# EAGLE board RedBot_Line_Sensor Panel v10 (EAGLE 6.4), part 1 of 2
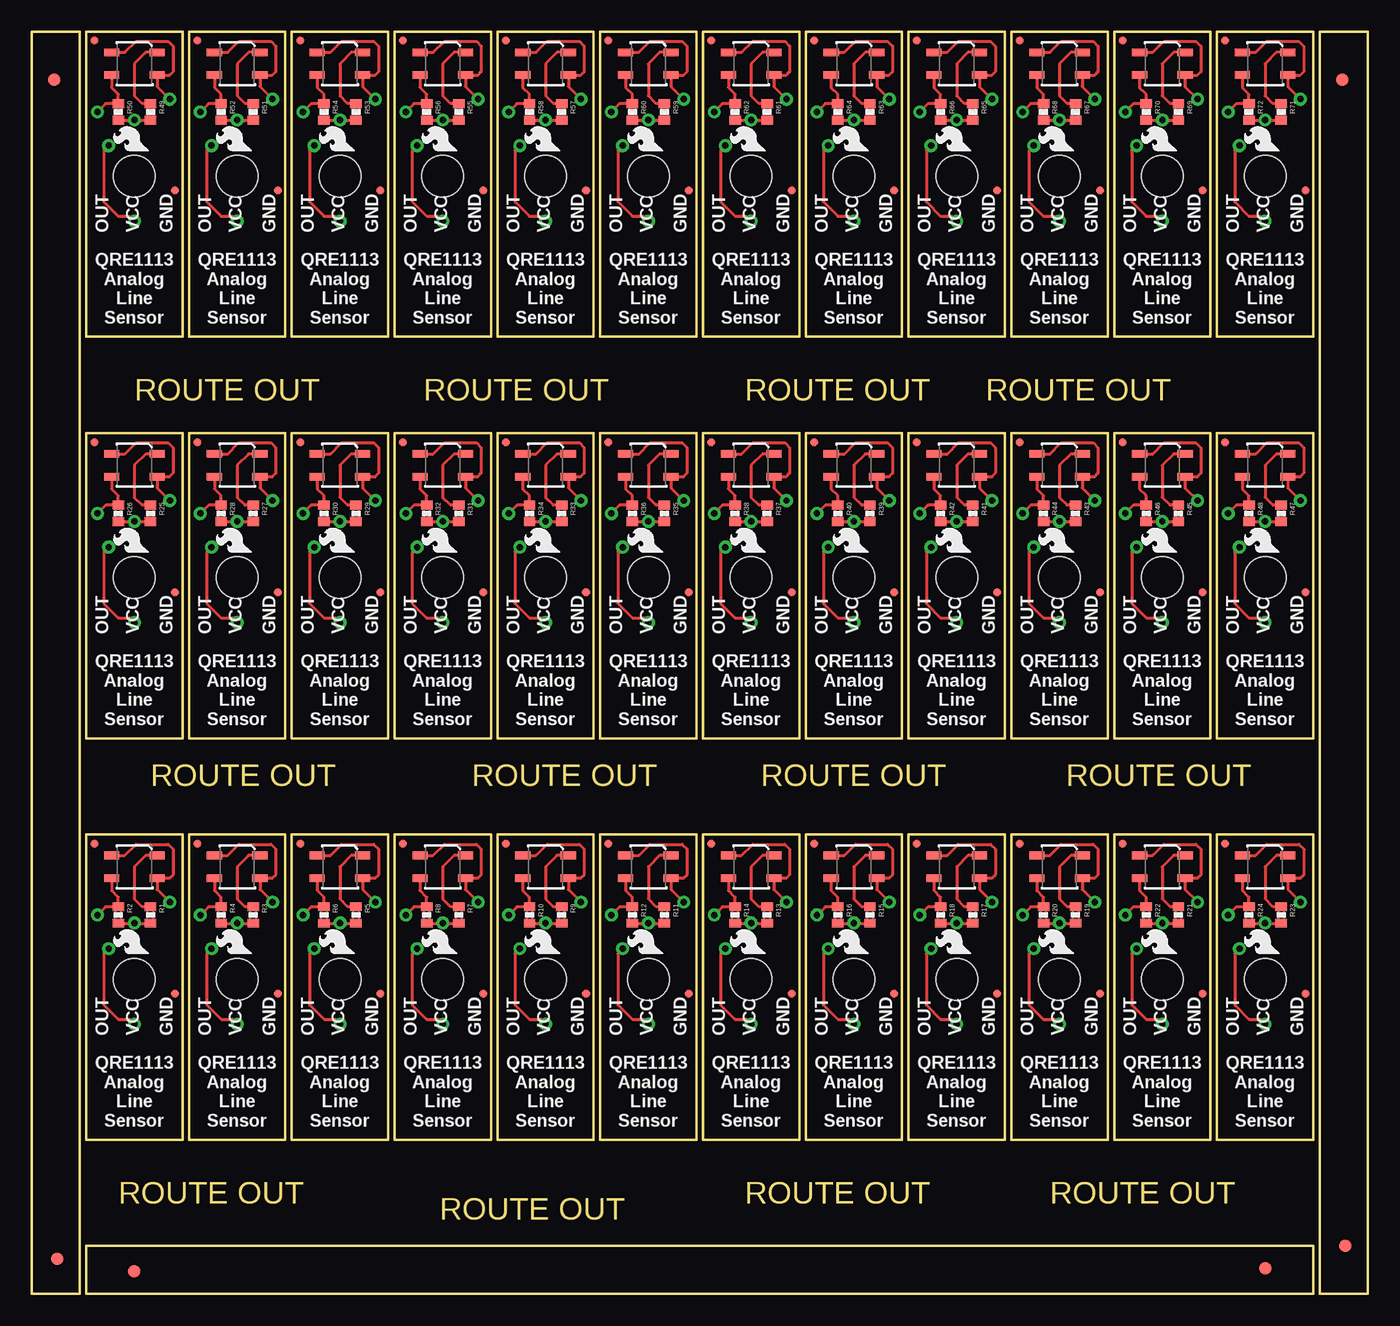
[diagram p0: board, top side]
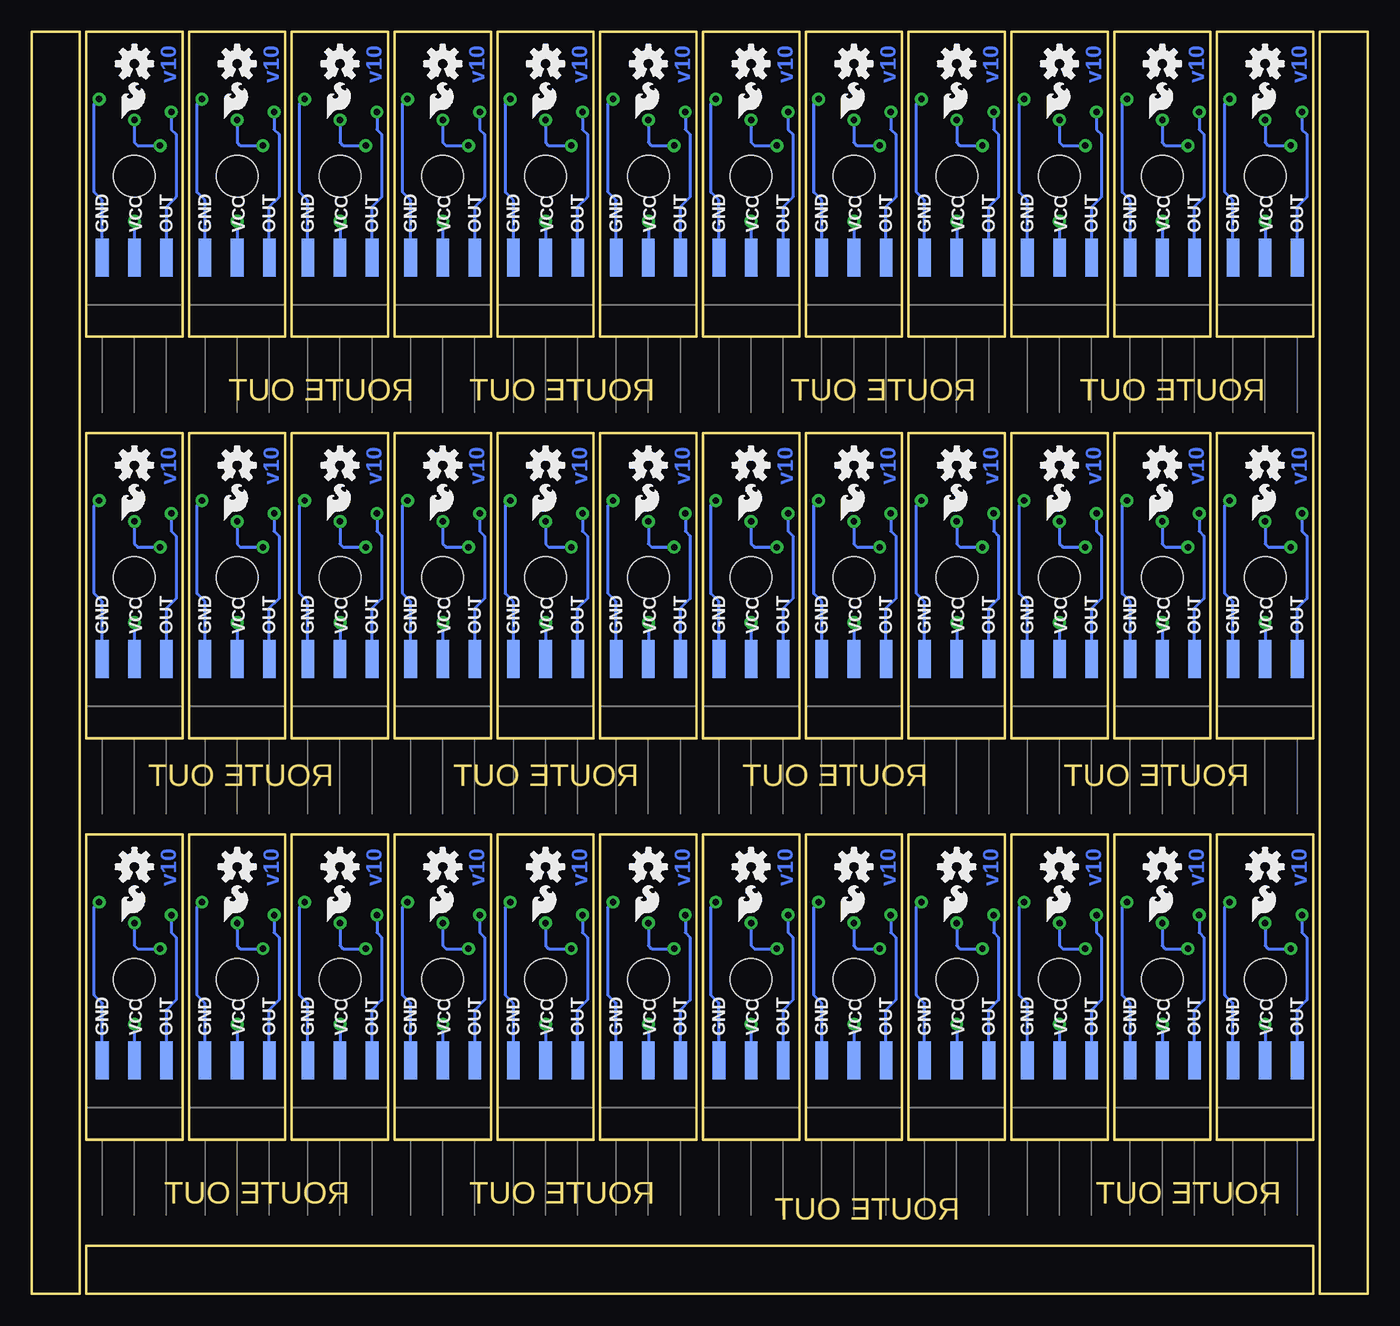
[diagram p1: board, bottom side, seen from below]

Size 105.66 x 99.82 mm. Coordinates in mm from the lower left corner, seen from the top.
Outline: 3.81,92.71 3.81,0 0,0 0,26.67
Outline: 0,10.92 0,99.82 3.81,99.82 3.81,76.96
Outline: 93.22,0 4.32,0 4.32,3.81 27.18,3.81
Outline: 101.85,1.52 101.85,78.23 101.85,97.28 101.85,99.82 105.66,99.82 105.66,76.96
Outline: 98.81,3.81 79.76,3.81
Outline: 79.76,3.81 12.45,3.81
Outline: 79.76,3.81 101.35,3.81 101.35,0 78.49,0
Outline: 105.66,2.54 105.66,21.59
Outline: 105.66,21.59 105.66,88.9
Outline: 105.66,21.59 105.66,0 101.85,0 101.85,22.86
Outline: 4.32,12.19 11.94,12.19 11.94,36.32 4.32,36.32 4.32,12.19
Outline: 12.45,12.19 20.07,12.19 20.07,36.32 12.45,36.32 12.45,12.19
Outline: 20.57,12.19 28.19,12.19 28.19,36.32 20.57,36.32 20.57,12.19
Outline: 28.7,12.19 36.32,12.19 36.32,36.32 28.7,36.32 28.7,12.19
Outline: 36.83,12.19 44.45,12.19 44.45,36.32 36.83,36.32 36.83,12.19
Outline: 44.96,12.19 52.58,12.19 52.58,36.32 44.96,36.32 44.96,12.19
Outline: 53.09,12.19 60.71,12.19 60.71,36.32 53.09,36.32 53.09,12.19
Outline: 61.21,12.19 68.83,12.19 68.83,36.32 61.21,36.32 61.21,12.19
Outline: 69.34,12.19 76.96,12.19 76.96,36.32 69.34,36.32 69.34,12.19
Outline: 77.47,12.19 85.09,12.19 85.09,36.32 77.47,36.32 77.47,12.19
Outline: 85.6,12.19 93.22,12.19 93.22,36.32 85.6,36.32 85.6,12.19
Outline: 93.73,12.19 101.35,12.19 101.35,36.32 93.73,36.32 93.73,12.19
Outline: 4.32,43.94 11.94,43.94 11.94,68.07 4.32,68.07 4.32,43.94
Outline: 12.45,43.94 20.07,43.94 20.07,68.07 12.45,68.07 12.45,43.94
Outline: 20.57,43.94 28.19,43.94 28.19,68.07 20.57,68.07 20.57,43.94
Outline: 28.7,43.94 36.32,43.94 36.32,68.07 28.7,68.07 28.7,43.94
Outline: 36.83,43.94 44.45,43.94 44.45,68.07 36.83,68.07 36.83,43.94
Outline: 44.96,43.94 52.58,43.94 52.58,68.07 44.96,68.07 44.96,43.94
Outline: 53.09,43.94 60.71,43.94 60.71,68.07 53.09,68.07 53.09,43.94
Outline: 61.21,43.94 68.83,43.94 68.83,68.07 61.21,68.07 61.21,43.94
Outline: 69.34,43.94 76.96,43.94 76.96,68.07 69.34,68.07 69.34,43.94
Outline: 77.47,43.94 85.09,43.94 85.09,68.07 77.47,68.07 77.47,43.94
Outline: 85.6,43.94 93.22,43.94 93.22,68.07 85.6,68.07 85.6,43.94
Outline: 93.73,43.94 101.35,43.94 101.35,68.07 93.73,68.07 93.73,43.94
Outline: 4.32,75.69 11.94,75.69 11.94,99.82 4.32,99.82 4.32,75.69
Outline: 12.45,75.69 20.07,75.69 20.07,99.82 12.45,99.82 12.45,75.69
Outline: 20.57,75.69 28.19,75.69 28.19,99.82 20.57,99.82 20.57,75.69
Outline: 28.7,75.69 36.32,75.69 36.32,99.82 28.7,99.82 28.7,75.69
Outline: 36.83,75.69 44.45,75.69 44.45,99.82 36.83,99.82 36.83,75.69
Outline: 44.96,75.69 52.58,75.69 52.58,99.82 44.96,99.82 44.96,75.69
Outline: 53.09,75.69 60.71,75.69 60.71,99.82 53.09,99.82 53.09,75.69
Outline: 61.21,75.69 68.83,75.69 68.83,99.82 61.21,99.82 61.21,75.69
Outline: 69.34,75.69 76.96,75.69 76.96,99.82 69.34,99.82 69.34,75.69
Outline: 77.47,75.69 85.09,75.69 85.09,99.82 77.47,99.82 77.47,75.69
Outline: 85.6,75.69 93.22,75.69 93.22,99.82 85.6,99.82 85.6,75.69
Outline: 93.73,75.69 101.35,75.69 101.35,99.82 93.73,99.82 93.73,75.69
Copper layers (1*16): Top 0.035mm / dielectric 1.5mm / Bottom 0.035mm
Design rules "Sparkfun": minimum track width 8mil, minimum drill 20mil, track to track 8mil, track to pad 8mil, pad to pad 8mil, via to via 8mil, smd to smd 8mil, copper to edge 8mil, drill to drill 8mil, minimum pad ring 12mil, minimum via ring 10mil, stop-mask expansion 4mil, vias tented up to drill 20mil, thermal gap 10mil

## Footprints (pad centres in the part's own frame; a part is rotated, then mirrored left to right if it is on the bottom)
FIDUCIAL-1X2 = smd 1 x 1: 1 0,0
MICRO-FIDUCIAL = smd 0.635 x 0.635: 1 0,0
1X03_SMD_RA_MALE = smd 1 x 3: 1 -2.54,5; 2 0,5; 3 2.54,5
0402-RES = smd 0.7 x 0.9: 1 -0.65,0; 2 0.65,0
STAND-OFF = hole 3.302: 0,0
QRE1113 = smd 1.2 x 0.6: 1 -1.8,-0.9; 2 1.8,-0.9; 3 1.8,0.9; 4 -1.8,0.9

## Placement (x,y rotation side)
E$1  [FIDUCIAL-1X2]  2.03,2.79 0 top
E$2  [FIDUCIAL-1X2]  1.78,96.01 180 top
E$3  [FIDUCIAL-1X2]  8.13,1.78 270 top
E$4  [FIDUCIAL-1X2]  103.63,96.01 180 top
E$5  [FIDUCIAL-1X2]  97.54,2.03 90 top
E$6  [FIDUCIAL-1X2]  103.89,3.81 0 top
FID1  FIDUCIALUFIDUCIAL  [MICRO-FIDUCIAL]  11.33,23.75 0 top
FID2  FIDUCIALUFIDUCIAL  [MICRO-FIDUCIAL]  4.98,35.61 0 top
FID3  FIDUCIALUFIDUCIAL  [MICRO-FIDUCIAL]  19.46,23.75 0 top
FID4  FIDUCIALUFIDUCIAL  [MICRO-FIDUCIAL]  13.11,35.61 0 top
FID5  FIDUCIALUFIDUCIAL  [MICRO-FIDUCIAL]  27.58,23.75 0 top
FID6  FIDUCIALUFIDUCIAL  [MICRO-FIDUCIAL]  21.23,35.61 0 top
FID7  FIDUCIALUFIDUCIAL  [MICRO-FIDUCIAL]  35.71,23.75 0 top
FID8  FIDUCIALUFIDUCIAL  [MICRO-FIDUCIAL]  29.36,35.61 0 top
FID9  FIDUCIALUFIDUCIAL  [MICRO-FIDUCIAL]  43.84,23.75 0 top
FID10  FIDUCIALUFIDUCIAL  [MICRO-FIDUCIAL]  37.49,35.61 0 top
FID11  FIDUCIALUFIDUCIAL  [MICRO-FIDUCIAL]  51.97,23.75 0 top
FID12  FIDUCIALUFIDUCIAL  [MICRO-FIDUCIAL]  45.62,35.61 0 top
FID13  FIDUCIALUFIDUCIAL  [MICRO-FIDUCIAL]  60.1,23.75 0 top
FID14  FIDUCIALUFIDUCIAL  [MICRO-FIDUCIAL]  53.75,35.61 0 top
FID15  FIDUCIALUFIDUCIAL  [MICRO-FIDUCIAL]  68.22,23.75 0 top
FID16  FIDUCIALUFIDUCIAL  [MICRO-FIDUCIAL]  61.87,35.61 0 top
FID17  FIDUCIALUFIDUCIAL  [MICRO-FIDUCIAL]  76.35,23.75 0 top
FID18  FIDUCIALUFIDUCIAL  [MICRO-FIDUCIAL]  70,35.61 0 top
FID19  FIDUCIALUFIDUCIAL  [MICRO-FIDUCIAL]  84.48,23.75 0 top
FID20  FIDUCIALUFIDUCIAL  [MICRO-FIDUCIAL]  78.13,35.61 0 top
FID21  FIDUCIALUFIDUCIAL  [MICRO-FIDUCIAL]  92.61,23.75 0 top
FID22  FIDUCIALUFIDUCIAL  [MICRO-FIDUCIAL]  86.26,35.61 0 top
FID23  FIDUCIALUFIDUCIAL  [MICRO-FIDUCIAL]  100.74,23.75 0 top
FID24  FIDUCIALUFIDUCIAL  [MICRO-FIDUCIAL]  94.39,35.61 0 top
FID25  FIDUCIALUFIDUCIAL  [MICRO-FIDUCIAL]  11.33,55.5 0 top
FID26  FIDUCIALUFIDUCIAL  [MICRO-FIDUCIAL]  4.98,67.36 0 top
FID27  FIDUCIALUFIDUCIAL  [MICRO-FIDUCIAL]  19.46,55.5 0 top
FID28  FIDUCIALUFIDUCIAL  [MICRO-FIDUCIAL]  13.11,67.36 0 top
FID29  FIDUCIALUFIDUCIAL  [MICRO-FIDUCIAL]  27.58,55.5 0 top
FID30  FIDUCIALUFIDUCIAL  [MICRO-FIDUCIAL]  21.23,67.36 0 top
FID31  FIDUCIALUFIDUCIAL  [MICRO-FIDUCIAL]  35.71,55.5 0 top
FID32  FIDUCIALUFIDUCIAL  [MICRO-FIDUCIAL]  29.36,67.36 0 top
FID33  FIDUCIALUFIDUCIAL  [MICRO-FIDUCIAL]  43.84,55.5 0 top
FID34  FIDUCIALUFIDUCIAL  [MICRO-FIDUCIAL]  37.49,67.36 0 top
FID35  FIDUCIALUFIDUCIAL  [MICRO-FIDUCIAL]  51.97,55.5 0 top
FID36  FIDUCIALUFIDUCIAL  [MICRO-FIDUCIAL]  45.62,67.36 0 top
FID37  FIDUCIALUFIDUCIAL  [MICRO-FIDUCIAL]  60.1,55.5 0 top
FID38  FIDUCIALUFIDUCIAL  [MICRO-FIDUCIAL]  53.75,67.36 0 top
FID39  FIDUCIALUFIDUCIAL  [MICRO-FIDUCIAL]  68.22,55.5 0 top
FID40  FIDUCIALUFIDUCIAL  [MICRO-FIDUCIAL]  61.87,67.36 0 top
FID41  FIDUCIALUFIDUCIAL  [MICRO-FIDUCIAL]  76.35,55.5 0 top
FID42  FIDUCIALUFIDUCIAL  [MICRO-FIDUCIAL]  70,67.36 0 top
FID43  FIDUCIALUFIDUCIAL  [MICRO-FIDUCIAL]  84.48,55.5 0 top
FID44  FIDUCIALUFIDUCIAL  [MICRO-FIDUCIAL]  78.13,67.36 0 top
FID45  FIDUCIALUFIDUCIAL  [MICRO-FIDUCIAL]  92.61,55.5 0 top
FID46  FIDUCIALUFIDUCIAL  [MICRO-FIDUCIAL]  86.26,67.36 0 top
FID47  FIDUCIALUFIDUCIAL  [MICRO-FIDUCIAL]  100.74,55.5 0 top
FID48  FIDUCIALUFIDUCIAL  [MICRO-FIDUCIAL]  94.39,67.36 0 top
FID49  FIDUCIALUFIDUCIAL  [MICRO-FIDUCIAL]  11.33,87.25 0 top
FID50  FIDUCIALUFIDUCIAL  [MICRO-FIDUCIAL]  4.98,99.11 0 top
FID51  FIDUCIALUFIDUCIAL  [MICRO-FIDUCIAL]  19.46,87.25 0 top
FID52  FIDUCIALUFIDUCIAL  [MICRO-FIDUCIAL]  13.11,99.11 0 top
FID53  FIDUCIALUFIDUCIAL  [MICRO-FIDUCIAL]  27.58,87.25 0 top
FID54  FIDUCIALUFIDUCIAL  [MICRO-FIDUCIAL]  21.23,99.11 0 top
FID55  FIDUCIALUFIDUCIAL  [MICRO-FIDUCIAL]  35.71,87.25 0 top
FID56  FIDUCIALUFIDUCIAL  [MICRO-FIDUCIAL]  29.36,99.11 0 top
FID57  FIDUCIALUFIDUCIAL  [MICRO-FIDUCIAL]  43.84,87.25 0 top
FID58  FIDUCIALUFIDUCIAL  [MICRO-FIDUCIAL]  37.49,99.11 0 top
FID59  FIDUCIALUFIDUCIAL  [MICRO-FIDUCIAL]  51.97,87.25 0 top
FID60  FIDUCIALUFIDUCIAL  [MICRO-FIDUCIAL]  45.62,99.11 0 top
FID61  FIDUCIALUFIDUCIAL  [MICRO-FIDUCIAL]  60.1,87.25 0 top
FID62  FIDUCIALUFIDUCIAL  [MICRO-FIDUCIAL]  53.75,99.11 0 top
FID63  FIDUCIALUFIDUCIAL  [MICRO-FIDUCIAL]  68.22,87.25 0 top
FID64  FIDUCIALUFIDUCIAL  [MICRO-FIDUCIAL]  61.87,99.11 0 top
FID65  FIDUCIALUFIDUCIAL  [MICRO-FIDUCIAL]  76.35,87.25 0 top
FID66  FIDUCIALUFIDUCIAL  [MICRO-FIDUCIAL]  70,99.11 0 top
FID67  FIDUCIALUFIDUCIAL  [MICRO-FIDUCIAL]  84.48,87.25 0 top
FID68  FIDUCIALUFIDUCIAL  [MICRO-FIDUCIAL]  78.13,99.11 0 top
FID69  FIDUCIALUFIDUCIAL  [MICRO-FIDUCIAL]  92.61,87.25 0 top
FID70  FIDUCIALUFIDUCIAL  [MICRO-FIDUCIAL]  86.26,99.11 0 top
FID71  FIDUCIALUFIDUCIAL  [MICRO-FIDUCIAL]  100.74,87.25 0 top
FID72  FIDUCIALUFIDUCIAL  [MICRO-FIDUCIAL]  94.39,99.11 0 top
JP1  [1X03_SMD_RA_MALE]  8.13,13.46 0 bottom
JP2  [1X03_SMD_RA_MALE]  16.26,13.46 0 bottom
JP3  [1X03_SMD_RA_MALE]  24.38,13.46 0 bottom
JP4  [1X03_SMD_RA_MALE]  32.51,13.46 0 bottom
JP5  [1X03_SMD_RA_MALE]  40.64,13.46 0 bottom
JP6  [1X03_SMD_RA_MALE]  48.77,13.46 0 bottom
JP7  [1X03_SMD_RA_MALE]  56.9,13.46 0 bottom
JP8  [1X03_SMD_RA_MALE]  65.02,13.46 0 bottom
JP9  [1X03_SMD_RA_MALE]  73.15,13.46 0 bottom
JP10  [1X03_SMD_RA_MALE]  81.28,13.46 0 bottom
JP11  [1X03_SMD_RA_MALE]  89.41,13.46 0 bottom
JP12  [1X03_SMD_RA_MALE]  97.54,13.46 0 bottom
JP13  [1X03_SMD_RA_MALE]  8.13,45.21 0 bottom
JP14  [1X03_SMD_RA_MALE]  16.26,45.21 0 bottom
JP15  [1X03_SMD_RA_MALE]  24.38,45.21 0 bottom
JP16  [1X03_SMD_RA_MALE]  32.51,45.21 0 bottom
JP17  [1X03_SMD_RA_MALE]  40.64,45.21 0 bottom
JP18  [1X03_SMD_RA_MALE]  48.77,45.21 0 bottom
JP19  [1X03_SMD_RA_MALE]  56.9,45.21 0 bottom
JP20  [1X03_SMD_RA_MALE]  65.02,45.21 0 bottom
JP21  [1X03_SMD_RA_MALE]  73.15,45.21 0 bottom
JP22  [1X03_SMD_RA_MALE]  81.28,45.21 0 bottom
JP23  [1X03_SMD_RA_MALE]  89.41,45.21 0 bottom
JP24  [1X03_SMD_RA_MALE]  97.54,45.21 0 bottom
JP25  [1X03_SMD_RA_MALE]  8.13,76.96 0 bottom
JP26  [1X03_SMD_RA_MALE]  16.26,76.96 0 bottom
JP27  [1X03_SMD_RA_MALE]  24.38,76.96 0 bottom
JP28  [1X03_SMD_RA_MALE]  32.51,76.96 0 bottom
JP29  [1X03_SMD_RA_MALE]  40.64,76.96 0 bottom
JP30  [1X03_SMD_RA_MALE]  48.77,76.96 0 bottom
JP31  [1X03_SMD_RA_MALE]  56.9,76.96 0 bottom
JP32  [1X03_SMD_RA_MALE]  65.02,76.96 0 bottom
JP33  [1X03_SMD_RA_MALE]  73.15,76.96 0 bottom
JP34  [1X03_SMD_RA_MALE]  81.28,76.96 0 bottom
JP35  [1X03_SMD_RA_MALE]  89.41,76.96 0 bottom
JP36  [1X03_SMD_RA_MALE]  97.54,76.96 0 bottom
LOGO1  LOGO-SFESK  [SFE-LOGO-FLAME]  9.27,26.92 90 top
LOGO2  OSHW-LOGOS  [OSHW-LOGO-S]  8.13,33.78 0 bottom
LOGO3  LOGO-SFESK  [SFE-LOGO-FLAME]  9.14,29.46 0 bottom
LOGO4  LOGO-SFESK  [SFE-LOGO-FLAME]  17.4,26.92 90 top
LOGO5  OSHW-LOGOS  [OSHW-LOGO-S]  16.26,33.78 0 bottom
LOGO6  LOGO-SFESK  [SFE-LOGO-FLAME]  17.27,29.46 0 bottom
LOGO7  LOGO-SFESK  [SFE-LOGO-FLAME]  25.53,26.92 90 top
LOGO8  OSHW-LOGOS  [OSHW-LOGO-S]  24.38,33.78 0 bottom
LOGO9  LOGO-SFESK  [SFE-LOGO-FLAME]  25.4,29.46 0 bottom
LOGO10  LOGO-SFESK  [SFE-LOGO-FLAME]  33.66,26.92 90 top
LOGO11  OSHW-LOGOS  [OSHW-LOGO-S]  32.51,33.78 0 bottom
LOGO12  LOGO-SFESK  [SFE-LOGO-FLAME]  33.53,29.46 0 bottom
LOGO13  LOGO-SFESK  [SFE-LOGO-FLAME]  41.78,26.92 90 top
LOGO14  OSHW-LOGOS  [OSHW-LOGO-S]  40.64,33.78 0 bottom
LOGO15  LOGO-SFESK  [SFE-LOGO-FLAME]  41.66,29.46 0 bottom
LOGO16  LOGO-SFESK  [SFE-LOGO-FLAME]  49.91,26.92 90 top
LOGO17  OSHW-LOGOS  [OSHW-LOGO-S]  48.77,33.78 0 bottom
LOGO18  LOGO-SFESK  [SFE-LOGO-FLAME]  49.78,29.46 0 bottom
LOGO19  LOGO-SFESK  [SFE-LOGO-FLAME]  58.04,26.92 90 top
LOGO20  OSHW-LOGOS  [OSHW-LOGO-S]  56.9,33.78 0 bottom
LOGO21  LOGO-SFESK  [SFE-LOGO-FLAME]  57.91,29.46 0 bottom
LOGO22  LOGO-SFESK  [SFE-LOGO-FLAME]  66.17,26.92 90 top
LOGO23  OSHW-LOGOS  [OSHW-LOGO-S]  65.02,33.78 0 bottom
LOGO24  LOGO-SFESK  [SFE-LOGO-FLAME]  66.04,29.46 0 bottom
LOGO25  LOGO-SFESK  [SFE-LOGO-FLAME]  74.3,26.92 90 top
LOGO26  OSHW-LOGOS  [OSHW-LOGO-S]  73.15,33.78 0 bottom
LOGO27  LOGO-SFESK  [SFE-LOGO-FLAME]  74.17,29.46 0 bottom
LOGO28  LOGO-SFESK  [SFE-LOGO-FLAME]  82.42,26.92 90 top
LOGO29  OSHW-LOGOS  [OSHW-LOGO-S]  81.28,33.78 0 bottom
LOGO30  LOGO-SFESK  [SFE-LOGO-FLAME]  82.3,29.46 0 bottom
LOGO31  LOGO-SFESK  [SFE-LOGO-FLAME]  90.55,26.92 90 top
LOGO32  OSHW-LOGOS  [OSHW-LOGO-S]  89.41,33.78 0 bottom
LOGO33  LOGO-SFESK  [SFE-LOGO-FLAME]  90.42,29.46 0 bottom
LOGO34  LOGO-SFESK  [SFE-LOGO-FLAME]  98.68,26.92 90 top
LOGO35  OSHW-LOGOS  [OSHW-LOGO-S]  97.54,33.78 0 bottom
LOGO36  LOGO-SFESK  [SFE-LOGO-FLAME]  98.55,29.46 0 bottom
LOGO37  LOGO-SFESK  [SFE-LOGO-FLAME]  9.27,58.67 90 top
LOGO38  OSHW-LOGOS  [OSHW-LOGO-S]  8.13,65.53 0 bottom
LOGO39  LOGO-SFESK  [SFE-LOGO-FLAME]  9.14,61.21 0 bottom
LOGO40  LOGO-SFESK  [SFE-LOGO-FLAME]  17.4,58.67 90 top
LOGO41  OSHW-LOGOS  [OSHW-LOGO-S]  16.26,65.53 0 bottom
LOGO42  LOGO-SFESK  [SFE-LOGO-FLAME]  17.27,61.21 0 bottom
LOGO43  LOGO-SFESK  [SFE-LOGO-FLAME]  25.53,58.67 90 top
LOGO44  OSHW-LOGOS  [OSHW-LOGO-S]  24.38,65.53 0 bottom
LOGO45  LOGO-SFESK  [SFE-LOGO-FLAME]  25.4,61.21 0 bottom
LOGO46  LOGO-SFESK  [SFE-LOGO-FLAME]  33.66,58.67 90 top
LOGO47  OSHW-LOGOS  [OSHW-LOGO-S]  32.51,65.53 0 bottom
LOGO48  LOGO-SFESK  [SFE-LOGO-FLAME]  33.53,61.21 0 bottom
LOGO49  LOGO-SFESK  [SFE-LOGO-FLAME]  41.78,58.67 90 top
LOGO50  OSHW-LOGOS  [OSHW-LOGO-S]  40.64,65.53 0 bottom
LOGO51  LOGO-SFESK  [SFE-LOGO-FLAME]  41.66,61.21 0 bottom
LOGO52  LOGO-SFESK  [SFE-LOGO-FLAME]  49.91,58.67 90 top
LOGO53  OSHW-LOGOS  [OSHW-LOGO-S]  48.77,65.53 0 bottom
LOGO54  LOGO-SFESK  [SFE-LOGO-FLAME]  49.78,61.21 0 bottom
LOGO55  LOGO-SFESK  [SFE-LOGO-FLAME]  58.04,58.67 90 top
LOGO56  OSHW-LOGOS  [OSHW-LOGO-S]  56.9,65.53 0 bottom
LOGO57  LOGO-SFESK  [SFE-LOGO-FLAME]  57.91,61.21 0 bottom
LOGO58  LOGO-SFESK  [SFE-LOGO-FLAME]  66.17,58.67 90 top
LOGO59  OSHW-LOGOS  [OSHW-LOGO-S]  65.02,65.53 0 bottom
LOGO60  LOGO-SFESK  [SFE-LOGO-FLAME]  66.04,61.21 0 bottom
LOGO61  LOGO-SFESK  [SFE-LOGO-FLAME]  74.3,58.67 90 top
LOGO62  OSHW-LOGOS  [OSHW-LOGO-S]  73.15,65.53 0 bottom
LOGO63  LOGO-SFESK  [SFE-LOGO-FLAME]  74.17,61.21 0 bottom
LOGO64  LOGO-SFESK  [SFE-LOGO-FLAME]  82.42,58.67 90 top
LOGO65  OSHW-LOGOS  [OSHW-LOGO-S]  81.28,65.53 0 bottom
LOGO66  LOGO-SFESK  [SFE-LOGO-FLAME]  82.3,61.21 0 bottom
LOGO67  LOGO-SFESK  [SFE-LOGO-FLAME]  90.55,58.67 90 top
LOGO68  OSHW-LOGOS  [OSHW-LOGO-S]  89.41,65.53 0 bottom
LOGO69  LOGO-SFESK  [SFE-LOGO-FLAME]  90.42,61.21 0 bottom
LOGO70  LOGO-SFESK  [SFE-LOGO-FLAME]  98.68,58.67 90 top
LOGO71  OSHW-LOGOS  [OSHW-LOGO-S]  97.54,65.53 0 bottom
LOGO72  LOGO-SFESK  [SFE-LOGO-FLAME]  98.55,61.21 0 bottom
LOGO73  LOGO-SFESK  [SFE-LOGO-FLAME]  9.27,90.42 90 top
LOGO74  OSHW-LOGOS  [OSHW-LOGO-S]  8.13,97.28 0 bottom
LOGO75  LOGO-SFESK  [SFE-LOGO-FLAME]  9.14,92.96 0 bottom
LOGO76  LOGO-SFESK  [SFE-LOGO-FLAME]  17.4,90.42 90 top
LOGO77  OSHW-LOGOS  [OSHW-LOGO-S]  16.26,97.28 0 bottom
LOGO78  LOGO-SFESK  [SFE-LOGO-FLAME]  17.27,92.96 0 bottom
LOGO79  LOGO-SFESK  [SFE-LOGO-FLAME]  25.53,90.42 90 top
LOGO80  OSHW-LOGOS  [OSHW-LOGO-S]  24.38,97.28 0 bottom
LOGO81  LOGO-SFESK  [SFE-LOGO-FLAME]  25.4,92.96 0 bottom
LOGO82  LOGO-SFESK  [SFE-LOGO-FLAME]  33.66,90.42 90 top
LOGO83  OSHW-LOGOS  [OSHW-LOGO-S]  32.51,97.28 0 bottom
LOGO84  LOGO-SFESK  [SFE-LOGO-FLAME]  33.53,92.96 0 bottom
LOGO85  LOGO-SFESK  [SFE-LOGO-FLAME]  41.78,90.42 90 top
LOGO86  OSHW-LOGOS  [OSHW-LOGO-S]  40.64,97.28 0 bottom
LOGO87  LOGO-SFESK  [SFE-LOGO-FLAME]  41.66,92.96 0 bottom
LOGO88  LOGO-SFESK  [SFE-LOGO-FLAME]  49.91,90.42 90 top
LOGO89  OSHW-LOGOS  [OSHW-LOGO-S]  48.77,97.28 0 bottom
LOGO90  LOGO-SFESK  [SFE-LOGO-FLAME]  49.78,92.96 0 bottom
LOGO91  LOGO-SFESK  [SFE-LOGO-FLAME]  58.04,90.42 90 top
LOGO92  OSHW-LOGOS  [OSHW-LOGO-S]  56.9,97.28 0 bottom
LOGO93  LOGO-SFESK  [SFE-LOGO-FLAME]  57.91,92.96 0 bottom
LOGO94  LOGO-SFESK  [SFE-LOGO-FLAME]  66.17,90.42 90 top
LOGO95  OSHW-LOGOS  [OSHW-LOGO-S]  65.02,97.28 0 bottom
LOGO96  LOGO-SFESK  [SFE-LOGO-FLAME]  66.04,92.96 0 bottom
LOGO97  LOGO-SFESK  [SFE-LOGO-FLAME]  74.3,90.42 90 top
LOGO98  OSHW-LOGOS  [OSHW-LOGO-S]  73.15,97.28 0 bottom
LOGO99  LOGO-SFESK  [SFE-LOGO-FLAME]  74.17,92.96 0 bottom
LOGO100  LOGO-SFESK  [SFE-LOGO-FLAME]  82.42,90.42 90 top
LOGO101  OSHW-LOGOS  [OSHW-LOGO-S]  81.28,97.28 0 bottom
LOGO102  LOGO-SFESK  [SFE-LOGO-FLAME]  82.3,92.96 0 bottom
LOGO103  LOGO-SFESK  [SFE-LOGO-FLAME]  90.55,90.42 90 top
LOGO104  OSHW-LOGOS  [OSHW-LOGO-S]  89.41,97.28 0 bottom
LOGO105  LOGO-SFESK  [SFE-LOGO-FLAME]  90.42,92.96 0 bottom
LOGO106  LOGO-SFESK  [SFE-LOGO-FLAME]  98.68,90.42 90 top
LOGO107  OSHW-LOGOS  [OSHW-LOGO-S]  97.54,97.28 0 bottom
LOGO108  LOGO-SFESK  [SFE-LOGO-FLAME]  98.55,92.96 0 bottom
R1  100  [0402-RES]  9.4,29.97 270 top
R2  10k  [0402-RES]  6.86,29.97 270 top
R3  100  [0402-RES]  17.53,29.97 270 top
R4  10k  [0402-RES]  14.99,29.97 270 top
R5  100  [0402-RES]  25.65,29.97 270 top
R6  10k  [0402-RES]  23.11,29.97 270 top
R7  100  [0402-RES]  33.78,29.97 270 top
R8  10k  [0402-RES]  31.24,29.97 270 top
R9  100  [0402-RES]  41.91,29.97 270 top
R10  10k  [0402-RES]  39.37,29.97 270 top
R11  100  [0402-RES]  50.04,29.97 270 top
R12  10k  [0402-RES]  47.5,29.97 270 top
R13  100  [0402-RES]  58.17,29.97 270 top
R14  10k  [0402-RES]  55.63,29.97 270 top
R15  100  [0402-RES]  66.29,29.97 270 top
R16  10k  [0402-RES]  63.75,29.97 270 top
R17  100  [0402-RES]  74.42,29.97 270 top
R18  10k  [0402-RES]  71.88,29.97 270 top
R19  100  [0402-RES]  82.55,29.97 270 top
R20  10k  [0402-RES]  80.01,29.97 270 top
R21  100  [0402-RES]  90.68,29.97 270 top
R22  10k  [0402-RES]  88.14,29.97 270 top
R23  100  [0402-RES]  98.81,29.97 270 top
R24  10k  [0402-RES]  96.27,29.97 270 top
R25  100  [0402-RES]  9.4,61.72 270 top
R26  10k  [0402-RES]  6.86,61.72 270 top
R27  100  [0402-RES]  17.53,61.72 270 top
R28  10k  [0402-RES]  14.99,61.72 270 top
R29  100  [0402-RES]  25.65,61.72 270 top
R30  10k  [0402-RES]  23.11,61.72 270 top
R31  100  [0402-RES]  33.78,61.72 270 top
R32  10k  [0402-RES]  31.24,61.72 270 top
R33  100  [0402-RES]  41.91,61.72 270 top
R34  10k  [0402-RES]  39.37,61.72 270 top
R35  100  [0402-RES]  50.04,61.72 270 top
R36  10k  [0402-RES]  47.5,61.72 270 top
R37  100  [0402-RES]  58.17,61.72 270 top
R38  10k  [0402-RES]  55.63,61.72 270 top
R39  100  [0402-RES]  66.29,61.72 270 top
R40  10k  [0402-RES]  63.75,61.72 270 top
R41  100  [0402-RES]  74.42,61.72 270 top
R42  10k  [0402-RES]  71.88,61.72 270 top
R43  100  [0402-RES]  82.55,61.72 270 top
R44  10k  [0402-RES]  80.01,61.72 270 top
R45  100  [0402-RES]  90.68,61.72 270 top
R46  10k  [0402-RES]  88.14,61.72 270 top
R47  100  [0402-RES]  98.81,61.72 270 top
R48  10k  [0402-RES]  96.27,61.72 270 top
R49  100  [0402-RES]  9.4,93.47 270 top
R50  10k  [0402-RES]  6.86,93.47 270 top
R51  100  [0402-RES]  17.53,93.47 270 top
R52  10k  [0402-RES]  14.99,93.47 270 top
R53  100  [0402-RES]  25.65,93.47 270 top
R54  10k  [0402-RES]  23.11,93.47 270 top
R55  100  [0402-RES]  33.78,93.47 270 top
R56  10k  [0402-RES]  31.24,93.47 270 top
R57  100  [0402-RES]  41.91,93.47 270 top
R58  10k  [0402-RES]  39.37,93.47 270 top
R59  100  [0402-RES]  50.04,93.47 270 top
R60  10k  [0402-RES]  47.5,93.47 270 top
R61  100  [0402-RES]  58.17,93.47 270 top
R62  10k  [0402-RES]  55.63,93.47 270 top
R63  100  [0402-RES]  66.29,93.47 270 top
R64  10k  [0402-RES]  63.75,93.47 270 top
R65  100  [0402-RES]  74.42,93.47 270 top
R66  10k  [0402-RES]  71.88,93.47 270 top
R67  100  [0402-RES]  82.55,93.47 270 top
R68  10k  [0402-RES]  80.01,93.47 270 top
R69  100  [0402-RES]  90.68,93.47 270 top
R70  10k  [0402-RES]  88.14,93.47 270 top
R71  100  [0402-RES]  98.81,93.47 270 top
R72  10k  [0402-RES]  96.27,93.47 270 top
STANDOFF1  STAND-OFF  [STAND-OFF]  8.13,24.89 0 top
STANDOFF2  STAND-OFF  [STAND-OFF]  16.26,24.89 0 top
STANDOFF3  STAND-OFF  [STAND-OFF]  24.38,24.89 0 top
STANDOFF4  STAND-OFF  [STAND-OFF]  32.51,24.89 0 top
STANDOFF5  STAND-OFF  [STAND-OFF]  40.64,24.89 0 top
STANDOFF6  STAND-OFF  [STAND-OFF]  48.77,24.89 0 top
STANDOFF7  STAND-OFF  [STAND-OFF]  56.9,24.89 0 top
STANDOFF8  STAND-OFF  [STAND-OFF]  65.02,24.89 0 top
STANDOFF9  STAND-OFF  [STAND-OFF]  73.15,24.89 0 top
STANDOFF10  STAND-OFF  [STAND-OFF]  81.28,24.89 0 top
STANDOFF11  STAND-OFF  [STAND-OFF]  89.41,24.89 0 top
STANDOFF12  STAND-OFF  [STAND-OFF]  97.54,24.89 0 top
STANDOFF13  STAND-OFF  [STAND-OFF]  8.13,56.64 0 top
STANDOFF14  STAND-OFF  [STAND-OFF]  16.26,56.64 0 top
STANDOFF15  STAND-OFF  [STAND-OFF]  24.38,56.64 0 top
STANDOFF16  STAND-OFF  [STAND-OFF]  32.51,56.64 0 top
STANDOFF17  STAND-OFF  [STAND-OFF]  40.64,56.64 0 top
STANDOFF18  STAND-OFF  [STAND-OFF]  48.77,56.64 0 top
STANDOFF19  STAND-OFF  [STAND-OFF]  56.9,56.64 0 top
STANDOFF20  STAND-OFF  [STAND-OFF]  65.02,56.64 0 top
STANDOFF21  STAND-OFF  [STAND-OFF]  73.15,56.64 0 top
STANDOFF22  STAND-OFF  [STAND-OFF]  81.28,56.64 0 top
STANDOFF23  STAND-OFF  [STAND-OFF]  89.41,56.64 0 top
STANDOFF24  STAND-OFF  [STAND-OFF]  97.54,56.64 0 top
STANDOFF25  STAND-OFF  [STAND-OFF]  8.13,88.39 0 top
STANDOFF26  STAND-OFF  [STAND-OFF]  16.26,88.39 0 top
STANDOFF27  STAND-OFF  [STAND-OFF]  24.38,88.39 0 top
STANDOFF28  STAND-OFF  [STAND-OFF]  32.51,88.39 0 top
STANDOFF29  STAND-OFF  [STAND-OFF]  40.64,88.39 0 top
STANDOFF30  STAND-OFF  [STAND-OFF]  48.77,88.39 0 top
STANDOFF31  STAND-OFF  [STAND-OFF]  56.9,88.39 0 top
STANDOFF32  STAND-OFF  [STAND-OFF]  65.02,88.39 0 top
STANDOFF33  STAND-OFF  [STAND-OFF]  73.15,88.39 0 top
STANDOFF34  STAND-OFF  [STAND-OFF]  81.28,88.39 0 top
STANDOFF35  STAND-OFF  [STAND-OFF]  89.41,88.39 0 top
STANDOFF36  STAND-OFF  [STAND-OFF]  97.54,88.39 0 top
U1  QRE1113  [QRE1113]  8.13,33.78 180 top
U2  QRE1113  [QRE1113]  16.26,33.78 180 top
U3  QRE1113  [QRE1113]  24.38,33.78 180 top
U4  QRE1113  [QRE1113]  32.51,33.78 180 top
U5  QRE1113  [QRE1113]  40.64,33.78 180 top
U6  QRE1113  [QRE1113]  48.77,33.78 180 top
U7  QRE1113  [QRE1113]  56.9,33.78 180 top
U8  QRE1113  [QRE1113]  65.02,33.78 180 top
U9  QRE1113  [QRE1113]  73.15,33.78 180 top
U10  QRE1113  [QRE1113]  81.28,33.78 180 top
U11  QRE1113  [QRE1113]  89.41,33.78 180 top
U12  QRE1113  [QRE1113]  97.54,33.78 180 top
U13  QRE1113  [QRE1113]  8.13,65.53 180 top
U14  QRE1113  [QRE1113]  16.26,65.53 180 top
U15  QRE1113  [QRE1113]  24.38,65.53 180 top
U16  QRE1113  [QRE1113]  32.51,65.53 180 top
U17  QRE1113  [QRE1113]  40.64,65.53 180 top
U18  QRE1113  [QRE1113]  48.77,65.53 180 top
U19  QRE1113  [QRE1113]  56.9,65.53 180 top
U20  QRE1113  [QRE1113]  65.02,65.53 180 top
U21  QRE1113  [QRE1113]  73.15,65.53 180 top
U22  QRE1113  [QRE1113]  81.28,65.53 180 top
U23  QRE1113  [QRE1113]  89.41,65.53 180 top
U24  QRE1113  [QRE1113]  97.54,65.53 180 top
U25  QRE1113  [QRE1113]  8.13,97.28 180 top
U26  QRE1113  [QRE1113]  16.26,97.28 180 top
U27  QRE1113  [QRE1113]  24.38,97.28 180 top
U28  QRE1113  [QRE1113]  32.51,97.28 180 top
U29  QRE1113  [QRE1113]  40.64,97.28 180 top
U30  QRE1113  [QRE1113]  48.77,97.28 180 top
U31  QRE1113  [QRE1113]  56.9,97.28 180 top
U32  QRE1113  [QRE1113]  65.02,97.28 180 top
U33  QRE1113  [QRE1113]  73.15,97.28 180 top
U34  QRE1113  [QRE1113]  81.28,97.28 180 top
U35  QRE1113  [QRE1113]  89.41,97.28 180 top
U36  QRE1113  [QRE1113]  97.54,97.28 180 top

## Library data of the parts
E$1-E$6 FID1-FID72 LOGO1-LOGO108 = SparkFun-Aesthetics
JP1-JP36 = SparkFun-Connectors; PROD_ID: CONN-10925
R1 R3 R5 R7 R9 R11 R13 R15 R17 R19 R21 R23 R25 R27 R29 R31 R33 R35 R37 R39 R41 R43 R45 R47 R49 R51 R53 R55 R57 R59 R61 R63 R65 R67 R69 R71 = SparkFun-Resistors; PROD_ID: RES-07863
R2 R4 R6 R8 R10 R12 R14 R16 R18 R20 R22 R24 R26 R28 R30 R32 R34 R36 R38 R40 R42 R44 R46 R48 R50 R52 R54 R56 R58 R60 R62 R64 R66 R68 R70 R72 = SparkFun-Resistors; PROD_ID: RES-00824
STANDOFF1-STANDOFF36 = SparkFun-Electromechanical
U1-U36 = SparkFun-Sensors; PROD_ID: IC-09357

## Nets
5V: JP1.2 R1.2 R2.2
5V1: JP2.2 R3.2 R4.2
5V2: JP3.2 R5.2 R6.2
5V3: JP4.2 R7.2 R8.2
5V4: JP5.2 R9.2 R10.2
5V5: JP6.2 R11.2 R12.2
5V6: JP7.2 R13.2 R14.2
5V7: JP8.2 R15.2 R16.2
5V8: JP9.2 R17.2 R18.2
5V9: JP10.2 R19.2 R20.2
5V10: JP11.2 R21.2 R22.2
5V11: JP12.2 R23.2 R24.2
5V12: JP13.2 R25.2 R26.2
5V13: JP14.2 R27.2 R28.2
5V14: JP15.2 R29.2 R30.2
5V15: JP16.2 R31.2 R32.2
5V16: JP17.2 R33.2 R34.2
5V17: JP18.2 R35.2 R36.2
5V18: JP19.2 R37.2 R38.2
5V19: JP20.2 R39.2 R40.2
5V20: JP21.2 R41.2 R42.2
5V21: JP22.2 R43.2 R44.2
5V22: JP23.2 R45.2 R46.2
5V23: JP24.2 R47.2 R48.2
5V24: JP25.2 R49.2 R50.2
5V25: JP26.2 R51.2 R52.2
5V26: JP27.2 R53.2 R54.2
5V27: JP28.2 R55.2 R56.2
5V28: JP29.2 R57.2 R58.2
5V29: JP30.2 R59.2 R60.2
5V30: JP31.2 R61.2 R62.2
5V31: JP32.2 R63.2 R64.2
5V32: JP33.2 R65.2 R66.2
5V33: JP34.2 R67.2 R68.2
5V34: JP35.2 R69.2 R70.2
5V35: JP36.2 R71.2 R72.2
GND: JP1.1 U1.2 U1.4
GND1: JP2.1 U2.2 U2.4
GND2: JP3.1 U3.2 U3.4
GND3: JP4.1 U4.2 U4.4
GND4: JP5.1 U5.2 U5.4
GND5: JP6.1 U6.2 U6.4
GND6: JP7.1 U7.2 U7.4
GND7: JP8.1 U8.2 U8.4
GND8: JP9.1 U9.2 U9.4
GND9: JP10.1 U10.2 U10.4
GND10: JP11.1 U11.2 U11.4
GND11: JP12.1 U12.2 U12.4
GND12: JP13.1 U13.2 U13.4
GND13: JP14.1 U14.2 U14.4
GND14: JP15.1 U15.2 U15.4
GND15: JP16.1 U16.2 U16.4
GND16: JP17.1 U17.2 U17.4
GND17: JP18.1 U18.2 U18.4
GND18: JP19.1 U19.2 U19.4
GND19: JP20.1 U20.2 U20.4
GND20: JP21.1 U21.2 U21.4
GND21: JP22.1 U22.2 U22.4
GND22: JP23.1 U23.2 U23.4
GND23: JP24.1 U24.2 U24.4
GND24: JP25.1 U25.2 U25.4
GND25: JP26.1 U26.2 U26.4
GND26: JP27.1 U27.2 U27.4
GND27: JP28.1 U28.2 U28.4
GND28: JP29.1 U29.2 U29.4
GND29: JP30.1 U30.2 U30.4
GND30: JP31.1 U31.2 U31.4
GND31: JP32.1 U32.2 U32.4
GND32: JP33.1 U33.2 U33.4
GND33: JP34.1 U34.2 U34.4
GND34: JP35.1 U35.2 U35.4
GND35: JP36.1 U36.2 U36.4
N$1: R1.1 U1.1
N$2: JP1.3 R2.1 U1.3
N$3: R3.1 U2.1
N$4: JP2.3 R4.1 U2.3
N$5: R5.1 U3.1
N$6: JP3.3 R6.1 U3.3
N$7: R7.1 U4.1
N$8: JP4.3 R8.1 U4.3
N$9: R9.1 U5.1
N$10: JP5.3 R10.1 U5.3
N$11: R11.1 U6.1
N$12: JP6.3 R12.1 U6.3
N$13: R13.1 U7.1
N$14: JP7.3 R14.1 U7.3
N$15: R15.1 U8.1
N$16: JP8.3 R16.1 U8.3
N$17: R17.1 U9.1
N$18: JP9.3 R18.1 U9.3
N$19: R19.1 U10.1
N$20: JP10.3 R20.1 U10.3
N$21: R21.1 U11.1
N$22: JP11.3 R22.1 U11.3
N$23: R23.1 U12.1
N$24: JP12.3 R24.1 U12.3
N$25: R25.1 U13.1
N$26: JP13.3 R26.1 U13.3
N$27: R27.1 U14.1
N$28: JP14.3 R28.1 U14.3
N$29: R29.1 U15.1
N$30: JP15.3 R30.1 U15.3
N$31: R31.1 U16.1
N$32: JP16.3 R32.1 U16.3
N$33: R33.1 U17.1
N$34: JP17.3 R34.1 U17.3
N$35: R35.1 U18.1
N$36: JP18.3 R36.1 U18.3
N$37: R37.1 U19.1
N$38: JP19.3 R38.1 U19.3
N$39: R39.1 U20.1
N$40: JP20.3 R40.1 U20.3
N$41: R41.1 U21.1
N$42: JP21.3 R42.1 U21.3
N$43: R43.1 U22.1
N$44: JP22.3 R44.1 U22.3
N$45: R45.1 U23.1
N$46: JP23.3 R46.1 U23.3
N$47: R47.1 U24.1
N$48: JP24.3 R48.1 U24.3
N$49: R49.1 U25.1
N$50: JP25.3 R50.1 U25.3
N$51: R51.1 U26.1
N$52: JP26.3 R52.1 U26.3
N$53: R53.1 U27.1
N$54: JP27.3 R54.1 U27.3
N$55: R55.1 U28.1
N$56: JP28.3 R56.1 U28.3
N$57: R57.1 U29.1
N$58: JP29.3 R58.1 U29.3
N$59: R59.1 U30.1
N$60: JP30.3 R60.1 U30.3
N$61: R61.1 U31.1
N$62: JP31.3 R62.1 U31.3
N$63: R63.1 U32.1
N$64: JP32.3 R64.1 U32.3
N$65: R65.1 U33.1
N$66: JP33.3 R66.1 U33.3
N$67: R67.1 U34.1
N$68: JP34.3 R68.1 U34.3
N$69: R69.1 U35.1
N$70: JP35.3 R70.1 U35.3
N$71: R71.1 U36.1
N$72: JP36.3 R72.1 U36.3